# EAGLE board open-bldc (EAGLE 5.06)
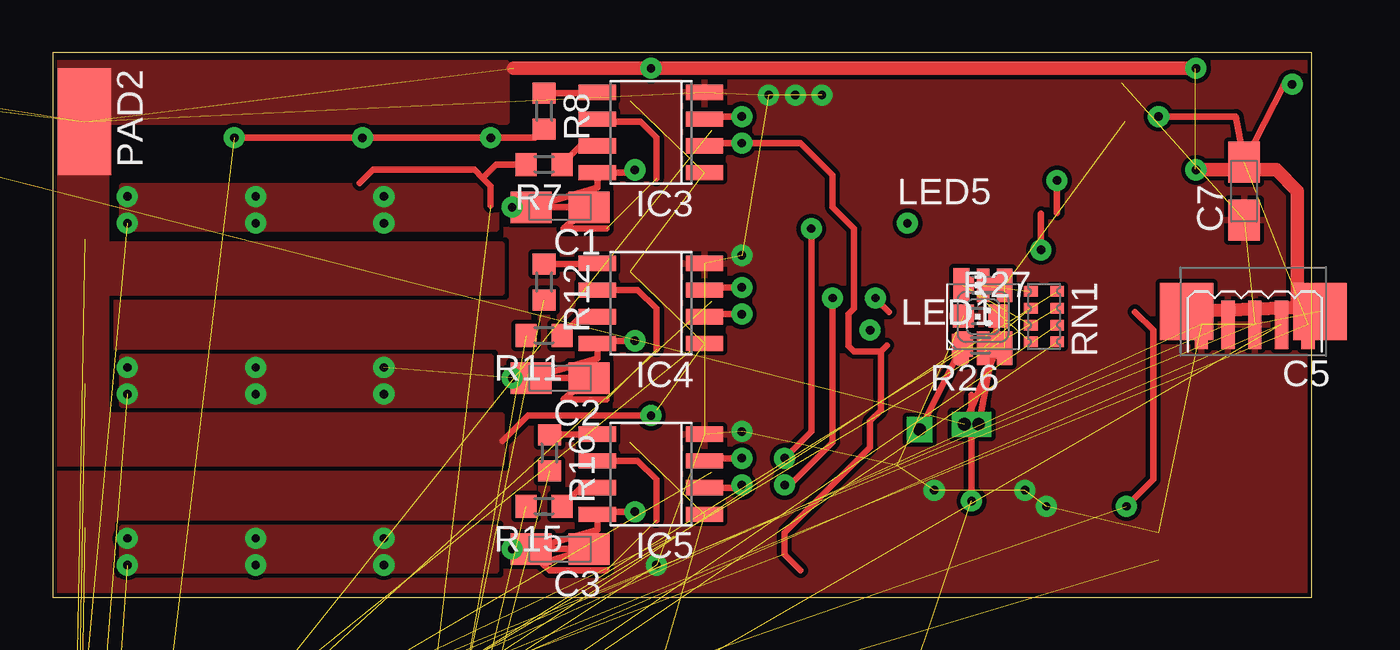
[diagram p0: board, top side]
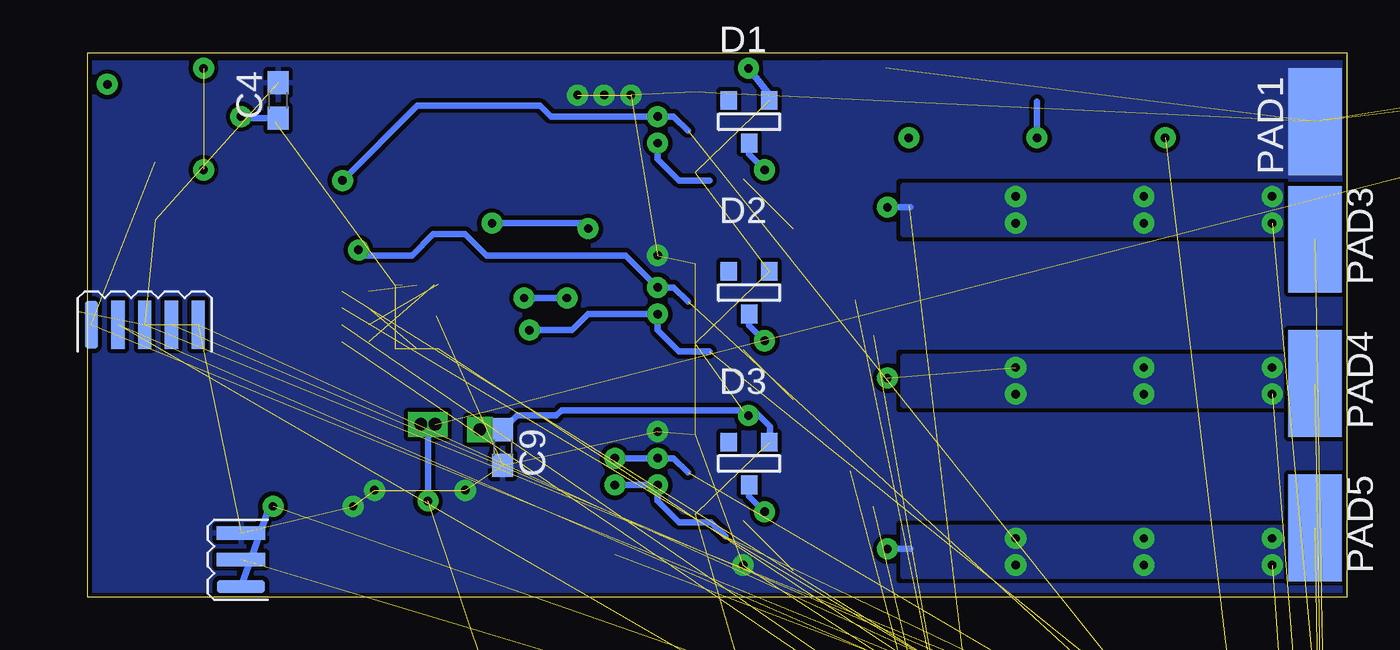
[diagram p1: board, bottom side, seen from below]

Size 59.87 x 25.9 mm. Coordinates in mm from the lower left corner, seen from the top.
Outline: 0,0 0,25.9 59.87,25.9 59.87,0 0.01,0
Copper layers (1*16): Top 0.035mm / dielectric 1.6mm / Bottom 0.035mm
Design rules "PCB-CART *": minimum track width 0.2mm, minimum drill 0.4mm, track to track 0.2mm, track to pad 0.2mm, pad to pad 0.2mm, via to via 0.2mm, smd to smd 0.2mm, copper to edge 0.2mm, drill to drill 0.2mm, minimum pad ring 0.4mm, minimum via ring 0.3mm, stop-mask expansion 3mil, vias tented up to drill 0mil, thermal gap 8mil
Net classes: 0 default: width 0.152 mm, drill 0.305 mm, clearance 0.152 mm

## Footprints (pad centres in the part's own frame; a part is rotated, then mirrored left to right if it is on the bottom)
SO8 = smd 0.72 x 1.78: 1 -1.905,-2.35; 2 -0.635,-2.35; 3 0.635,-2.35; 4 1.905,-2.35; 5 1.905,2.35; 6 0.635,2.35; 7 -0.635,2.35; 8 -1.905,2.35
A/3216-18R = smd 1.95 x 1.5: + 1.375,0; - -1.375,0
C0603 = smd 1.1 x 1: 1 -0.85,0; 2 0.85,0
D/7343-31R = smd 2.55 x 2.7: + 3.175,0; - -3.175,0
E5-6 = drill 0.813 pad 1.905 round: + -2.54,0 | drill 0.813 pad 1.905 octagon: - 2.54,0
SOT-23 = smd 0.787 x 0.889: 1 0.025,-1.016; 2 -0.94,1.016; 3 0.991,1.016
SOT23 = smd 1 x 1.4: 1 -0.95,-1.1; 2 0.95,-1.1; 3 0,1.1
PIN_HDR_EDG_1.27MM_3-1 = smd 2.3 x 0.635: P$1 0,0; P$2 0,1.27; P$3 0,2.54
TQFP48 = smd 0.2 x 1: 1 -2.75,-4.5; 2 -2.25,-4.5; 3 -1.75,-4.5; 4 -1.25,-4.5; 5 -0.75,-4.5; 6 -0.25,-4.5; 7 0.25,-4.5; 8 0.75,-4.5; 9 1.25,-4.5; 10 1.75,-4.5; 11 2.25,-4.5; 12 2.75,-4.5; 25 2.75,4.5; 26 2.25,4.5; 27 1.75,4.5; 28 1.25,4.5; 29 0.75,4.5; 30 0.25,4.5; 31 -0.25,4.5; 32 -0.75,4.5; 33 -1.25,4.5; 34 -1.75,4.5; 35 -2.25,4.5; 36 -2.75,4.5 | smd 1 x 0.2: 13 4.5,-2.75; 14 4.5,-2.25; 15 4.5,-1.75; 16 4.5,-1.25; 17 4.5,-0.75; 18 4.5,-0.25; 19 4.5,0.25; 20 4.5,0.75; 21 4.5,1.25; 22 4.5,1.75; 23 4.5,2.25; 24 4.5,2.75; 37 -4.5,2.75; 38 -4.5,2.25; 39 -4.5,1.75; 40 -4.5,1.25; 41 -4.5,0.75; 42 -4.5,0.25; 43 -4.5,-0.25; 44 -4.5,-0.75; 45 -4.5,-1.25; 46 -4.5,-1.75; 47 -4.5,-2.25; 48 -4.5,-2.75
SOT223 = smd 1.219 x 2.235: 1 -2.311,-3.099; 2 0,-3.099; 3 2.311,-3.099 | smd 3.6 x 2.2: 4 0,3.099
SO-8 = smd 0.72 x 1.78: 1 -1.905,-2.543; 2 -0.635,-2.543; 3 0.635,-2.543; 4 1.905,-2.543; 5 1.905,2.543; 6 0.635,2.543; 7 -0.635,2.543; 8 -1.905,2.543
PIN_HDR_1.27MM_10 = drill 0.5 square: P$1 0,0 | drill 0.5 round: P$2 0,1.27; P$3 0,2.54; P$4 0,3.81; P$5 0,5.08; P$6 0,6.35; P$7 0,7.62; P$8 0,8.89; P$9 0,10.16; P$10 0,11.43
PIN_HDR_EDG_1.27MM_5-2 = smd 2.3 x 0.635: P$1 0,0; P$3 0,1.27; P$5 0,2.54; P$7 0,3.81; P$9 0,5.08 | smd 2.3 x 0.635 bottom: P$2 0,0; P$4 0,1.27; P$6 0,2.54; P$8 0,3.81; P$10 0,5.08
CHIP-LED0603 = smd 0.8 x 0.8: A 0,-0.75; C 0,0.75
PLCC6 = smd 0.75 x 1.6: A1 -1.025,-1.5; A2 1.025,-1.5; A3 1.025,1.5; C1 -1.025,1.525 | smd 0.6 x 1.6: C2 0,-1.5; C3 0,1.5
SMD2,54-5,08 = smd 2.54 x 5.08: 1 0,0
D2PACK = smd 2.083 x 3.81: 1 -2.54,-8.89; 3 2.54,-8.89 | smd 11.43 x 8.89: 2 0,2.54
R0603 = smd 1 x 1.1: 1 -0.85,0; 2 0.85,0
0603-ARC = smd 0.5 x 0.65: 1 -1.2,-0.625; 2 -0.4,-0.625; 3 0.4,-0.625; 4 1.2,-0.625; 5 1.2,0.625; 6 0.4,0.625; 7 -0.4,0.625; 8 -1.2,0.625
EXB34V = smd 0.5 x 0.5: 1 -0.5,-0.7; 2 0.5,-0.7; 3 0.5,0.7; 4 -0.5,0.7
SJ = smd 1.168 x 1.6: 1 -0.762,0; 2 0.762,0
SJ2S = smd 1 x 1.1: 1 -1.3,0; 2 0,0; 3 1.3,0
ZX62-B-5PA = smd 1.8 x 1.9: GND_LEFT -4,0; GND_RIGHT 4,0 | smd 1.9 x 1.9: GND_MID_LEFT -1.2,0; GND_MID_RIGHT 1.2,0 | smd 2.1 x 1.6: GND_UP_LEFT -3.1,2.6; GND_UP_RIGHT 3.1,2.6 | smd 0.4 x 1.35: PIN_1 -1.3,2.725; PIN_2 -0.65,2.725; PIN_3 0,2.725; PIN_4 0.65,2.725; PIN_5 1.3,2.725
PIN_HDR_EDG_1.27MM_3-2 = smd 2.3 x 0.635: P$1 0,0; P$3 0,1.27; P$5 0,2.54 | smd 2.3 x 0.635 bottom: P$2 0,0; P$4 0,1.27; P$6 0,2.54

## Placement (x,y rotation side)
ACS1  ACS712  [SO8]  -6.88,-339.04 0 top  (outside the outline)
ACS2  ACS712  [SO8]  -6.88,-361.19 0 top  (outside the outline)
ACS3  ACS712  [SO8]  -6.88,-383.36 0 top  (outside the outline)
ACS712  ACS712  [SO8]  1.8,-96.19 0 top  (outside the outline)
C1  10µ  [A/3216-18R]  24.13,18.54 180 top
C2  10µ  [A/3216-18R]  24.13,10.41 180 top
C3  10µ  [A/3216-18R]  24.13,2.29 180 top
C4  100nF  [C0603]  50.8,23.62 90 bottom
C5  100µ  [D/7343-31R]  57.08,13.59 180 top
C6  100nF  [C0603]  6.86,-155.07 0 top  (outside the outline)
C7  1µ  [A/3216-18R]  56.64,19.3 90 top
C8  1µ  [A/3216-18R]  10.19,-147.7 0 top  (outside the outline)
C9  100n  [C0603]  40.13,7.11 270 bottom
C10  100n  [C0603]  -1.6,-102.74 0 top  (outside the outline)
C11  1n  [C0603]  -1.7,-108.48 0 top  (outside the outline)
C12  100n  [C0603]  -2.51,-132.59 0 top  (outside the outline)
C13  1n  [C0603]  -2.62,-160.12 0 top  (outside the outline)
C14  100nF  [C0603]  0,-22.86 0 top  (outside the outline)
C15  1n  [C0603]  -2.72,-165.86 0 top  (outside the outline)
C16  1n  [C0603]  -2.82,-171.58 0 top  (outside the outline)
C17  47p  [C0603]  -16.08,-228.68 0 top  (outside the outline)
C18  47p  [C0603]  -16.18,-234.42 0 top  (outside the outline)
C19  100n  [C0603]  -0.3,-345.59 0 top  (outside the outline)
C20  1n  [C0603]  -4.42,-352.15 0 top  (outside the outline)
C21  100n  [C0603]  -10.16,-352.17 0 top  (outside the outline)
C22  100n  [C0603]  -0.3,-367.74 0 top  (outside the outline)
C23  1n  [C0603]  -4.42,-374.32 0 top  (outside the outline)
C24  100n  [C0603]  -10.16,-374.35 0 top  (outside the outline)
C25  100n  [C0603]  -0.3,-389.92 0 top  (outside the outline)
C26  1n  [C0603]  -4.42,-396.49 0 top  (outside the outline)
C27  100n  [C0603]  -10.16,-396.49 0 top  (outside the outline)
C28  100n  [C0603]  -19.5,-402.5 0 top  (outside the outline)
C29  100n  [C0603]  -19.5,-408.5 0 top  (outside the outline)
C30  100n  [C0603]  -19.5,-414.5 0 top  (outside the outline)
C31  100µ  [D/7343-31R]  -101.76,-453.89 0 top  (outside the outline)
C32  100nF  [C0603]  -124.62,-526.9 0 top  (outside the outline)
C33  100nF  [C0603]  -124.72,-532.64 0 top  (outside the outline)
C34  100nF  [C0603]  -124.82,-538.37 0 top  (outside the outline)
C35  4µ7  [A/3216-18R]  -123.95,-544.36 0 top  (outside the outline)
C36  10nF  [C0603]  -125.69,-550.1 0 top  (outside the outline)
C37  1µ  [C0603]  -125.79,-555.83 0 top  (outside the outline)
C38  100µ  [D/7343-31R]  -132.12,-563.56 0 top  (outside the outline)
C39  100µ  [D/7343-31R]  -132.45,-572.47 0 top  (outside the outline)
C40  100n  [C0603]  -135.83,-579.84 0 top  (outside the outline)
C41  optional  [E5-6]  -133.81,-586.6 0 top  (outside the outline)
D1  BAS21  [SOT-23]  28.45,22.61 0 bottom
D2  BAS21  [SOT-23]  28.45,14.48 0 bottom
D3  BAS21  [SOT-23]  28.45,6.35 0 bottom
D4  BAS70-04  [SOT23]  0.41,-41.96 0 top  (outside the outline)
D5  BAS70-04  [SOT23]  0.08,-67.26 0 top  (outside the outline)
D6  BAS70-04  [SOT23]  -0.18,-86.69 0 top  (outside the outline)
I2C  PIN_HDR_EDG_1.27MM_3-1  [PIN_HDR_EDG_1.27MM_3-1]  52.58,0.51 0 bottom
IC1  STM32F10XCXT6  [TQFP48]  3.81,-13.97 0 top  (outside the outline)
IC2  3V3 vreg  [SOT223]  -101.35,-463.13 0 top  (outside the outline)
IC3  IR2101  [SO-8]  28.45,22.1 90 top
IC4  IR2101  [SO-8]  28.45,13.97 90 top
IC5  IR2101  [SO-8]  28.45,5.84 90 top
IC6  5V vreg  [SOT223]  -101.73,-472.38 0 top  (outside the outline)
JP11  PIN_HDR_1.27MM_10  [PIN_HDR_1.27MM_10]  -101.71,-447.71 0 top  (outside the outline)
JP12  PIN_HDR_1.27MM_10  [PIN_HDR_1.27MM_10]  -104.68,-448.28 0 top  (outside the outline)
JP21  PIN_HDR_1.27MM_10  [PIN_HDR_1.27MM_10]  -104.37,35.08 0 top  (outside the outline)
JP22  PIN_HDR_1.27MM_10  [PIN_HDR_1.27MM_10]  -101.09,35.08 0 top  (outside the outline)
JTAG  PIN_HDR_EDG_1.27MM_5-2  [PIN_HDR_EDG_1.27MM_5-2]  59.69,12.95 270 bottom
LED1  AMBER  [CHIP-LED0603]  44.16,14.85 90 top
LED5  LED_LRTB_G6TG  [PLCC6]  44.23,13.33 0 top
PAD1  BATT-  [SMD2,54-5,08]  1.52,22.61 0 bottom
PAD2  BATT+  [SMD2,54-5,08]  1.52,22.61 180 top
PAD3  PHASE_A  [SMD2,54-5,08]  1.52,17.02 180 bottom
PAD4  PHASE_B  [SMD2,54-5,08]  1.52,10.16 180 bottom
PAD5  PHASE_C  [SMD2,54-5,08]  1.52,3.3 180 bottom
PAD6  BATT+  [SMD2,54-5,08]  -128.77,-556.08 0 top  (outside the outline)
PAD7  BATT-  [SMD2,54-5,08]  -133.41,-556.31 0 top  (outside the outline)
Q1  IRF3704S  [D2PACK]  -31.88,-434.76 0 top  (outside the outline)
Q2  IRF3704S  [D2PACK]  -44.27,-435.27 0 top  (outside the outline)
Q3  IRF3704S  [D2PACK]  -56.66,-435.78 0 top  (outside the outline)
Q4  IRF3704S  [D2PACK]  -69.05,-436.3 0 top  (outside the outline)
Q5  IRF3704S  [D2PACK]  -81.44,-436.81 0 top  (outside the outline)
Q6  IRF3704S  [D2PACK]  -93.83,-437.32 0 top  (outside the outline)
R1  NP  [R0603]  -131.45,61.27 0 top  (outside the outline)
R2  0  [R0603]  -131.45,67.82 0 top  (outside the outline)
R7  22  [R0603]  23.37,20.57 180 top
R8  22  [R0603]  23.37,23.11 270 top
R11  22  [R0603]  23.37,12.45 180 top
R12  22  [R0603]  23.37,14.99 270 top
R15  22  [R0603]  23.37,4.32 180 top
R16  R22  [R0603]  23.62,6.86 270 top
R17  10k  [R0603]  -0.43,-35.08 0 top  (outside the outline)
R18  3k6  [R0603]  -0.56,-48.64 0 top  (outside the outline)
R19  10k  [R0603]  -0.66,-54.51 0 top  (outside the outline)
R20  3k6  [R0603]  -0.76,-60.38 0 top  (outside the outline)
R21  10k  [R0603]  -0.89,-73.94 0 top  (outside the outline)
R22  3k6  [R0603]  -0.99,-79.81 0 top  (outside the outline)
R23  2k  [R0603]  -1.8,-114.35 0 top  (outside the outline)
R24  10k  [R0603]  -1.91,-120.19 0 top  (outside the outline)
R26  10k  [R0603]  44.11,11.97 180 top
R27  2k7  [R0603]  44.15,13.36 0 top
R34  22  [R0603]  -15.88,-217.07 0 top  (outside the outline)
R35  22  [R0603]  -15.98,-222.94 0 top  (outside the outline)
R36  1k5  [R0603]  -16.31,-240.26 0 top  (outside the outline)
R41  2k  [R0603]  -10.16,-346.41 0 top  (outside the outline)
R42  10k  [R0603]  -5.23,-346.41 0 top  (outside the outline)
R43  2k  [R0603]  -10.16,-368.58 0 top  (outside the outline)
R44  10k  [R0603]  -5.23,-368.58 0 top  (outside the outline)
R45  2k  [R0603]  -10.16,-390.75 0 top  (outside the outline)
R46  10k  [R0603]  -5.23,-390.75 0 top  (outside the outline)
RN1  1k  [0603-ARC]  47.13,13.34 90 top
RN2  10k  [EXB34V]  -119.73,-487.71 0 top  (outside the outline)
RN3  10k  [EXB34V]  -119.85,-492.32 0 top  (outside the outline)
RN4  10k  [EXB34V]  -119.98,-496.93 0 top  (outside the outline)
RN5  10k  [EXB34V]  -120.11,-503.17 0 top  (outside the outline)
RN6  10k  [EXB34V]  -120.24,-509.42 0 top  (outside the outline)
RN7  10k  [EXB34V]  -120.37,-515.67 0 top  (outside the outline)
SJ1  [SJ]  -14.96,-212.85 0 top  (outside the outline)
SJ2  SJ2S  [SJ2S]  -119.04,-521.91 0 top  (outside the outline)
SJ3  SJ2S  [SJ2S]  -113.63,49.82 0 top  (outside the outline)
SJ4  SJ2S  [SJ2S]  -113.63,54.73 0 top  (outside the outline)
U3  ZX62-B-5PA  [ZX62-B-5PA]  -13.28,-285.93 0 top  (outside the outline)
USART  PIN_HDR_EDG_1.27MM_3-2  [PIN_HDR_EDG_1.27MM_3-2]  -123.68,-522.82 0 top  (outside the outline)

## Library data of the parts
ACS1-ACS3 ACS712 I2C IC3-IC5 JP11 JP12 JP21 JP22 JTAG LED5 SJ2-SJ4 U3 USART = open-bldc
C1-C41 R1 R2 R7 R8 R11 R12 R15-R24 R26 R27 R34-R36 R41-R46 = rcl
D1-D3 = zetex
D4-D6 = diode
IC1 = stm32
IC2 IC6 = linear-technology
LED1 = led
PAD1-PAD7 = wirepad
Q1-Q6 = my-transistor-power
RN1-RN7 = resistor-dil
SJ1 = jumper

## Nets
+3V3: C4.1 C7.+ C32.1 C33.1 C34.1 C35.+ C36.1 C37.1 D4.2 D5.2 D6.2 IC1.9 IC1.24 IC1.36 IC1.48 IC2.3 JP12.P$2 JP22.P$2 JTAG.P$2 LED1.A LED5.A1 LED5.A2 LED5.A3 R36.1 RN5.1 RN5.2 RN6.1 RN6.2 RN7.3 RN7.4 USART.P$6
+5V: ACS1.8 ACS2.8 ACS3.8 ACS712.8 C6.1 C8.+ C10.1 C19.1 C22.1 C25.1 IC2.1 JP12.P$3 JP22.P$3 SJ1.1 USART.P$2
+12V: ACS712.1 ACS712.2 C5.+ C9.1 C28.1 C29.1 C30.1 C31.+ C38.+ C39.+ C40.1 C41.+ D1.3 D2.3 D3.3 IC3.1 IC4.1 IC5.1 IC6.1 JP12.P$4 JP22.P$4 PAD2.1 PAD6.1 R1.2 R26.2
+12V_I_SENSE: ACS712.3 ACS712.4 Q1.2 Q3.2 Q5.2
BATT_V: JP12.P$9 JP22.P$9 R26.1 R27.2
BEMF_A: C15.1 D4.3 R17.2 R18.1 SJ2.1
BEMF_B: C13.1 D5.3 R19.2 R20.1 SJ3.1
BEMF_C: C16.1 D6.3 R21.2 R22.1 SJ4.1
CTRL_A+: IC1.29 IC3.2 JP11.P$2 JP21.P$2 RN2.3
CTRL_A-: IC1.26 IC3.3 JP11.P$4 JP21.P$4 RN2.4
CTRL_B+: IC1.30 IC4.2 JP11.P$5 JP21.P$5 RN3.3
CTRL_B-: IC1.27 IC4.3 JP11.P$7 JP21.P$7 RN3.4
CTRL_C+: IC1.31 IC5.2 JP11.P$8 JP21.P$8 RN4.3
CTRL_C-: IC1.28 IC5.3 JP11.P$10 JP21.P$10 RN4.4
GND: ACS1.5 ACS2.5 ACS3.5 ACS712.5 C4.2 C5.- C6.2 C7.- C8.- C9.2 C10.2 C11.2 C12.2 C13.2 C14.2 C15.2 C16.2 C17.2 C18.2 C19.2 C20.2 C21.2 C22.2 C23.2 C24.2 C25.2 C26.2 C27.2 C28.2 C29.2 C30.2 C31.- C32.2 C33.2 C34.2 C35.- C36.2 C37.2 C38.- C39.- C40.2 C41.- D4.1 D5.1 D6.1 I2C.P$3 IC1.8 IC1.23 IC1.35 IC1.47 IC2.2 IC2.4 IC3.4 IC4.4 IC5.4 IC6.2 IC6.4 JP11.P$1 JP12.P$1 JP21.P$1 JP22.P$1 JTAG.P$6 JTAG.P$8 JTAG.P$10 PAD1.1 PAD7.1 Q2.3 Q4.3 Q6.3 R2.1 R18.2 R20.2 R22.2 R24.2 R27.1 R42.2 R44.2 R46.2 RN2.1 RN2.2 RN3.1 RN3.2 RN4.1 RN4.2 U3.GND_LEFT U3.GND_RIGHT U3.GND_UP_LEFT U3.GND_UP_RIGHT U3.PIN_4 USART.P$3 USART.P$4
I/BEMF_A: IC1.10 JP11.P$3 JP21.P$3 SJ2.2
I/BEMF_B: IC1.11 JP11.P$6 JP21.P$6 SJ3.2
I/BEMF_C: IC1.12 JP11.P$9 JP21.P$9 SJ4.2
I_A: C21.1 R41.1 R42.1 SJ2.3
I_B: C24.1 R43.1 R44.1 SJ3.3
I_C: C27.1 R45.1 R46.1 SJ4.3
I_SENSE: C12.1 IC1.13 JP12.P$10 JP22.P$10 R23.1 R24.1
LED1: IC1.17 RN1.1
LED2: IC1.18 RN1.2
LED3: IC1.45 RN1.3
LED4: IC1.46 RN1.4
MOT_TEMP: IC1.19 JP12.P$8 JP22.P$8
N$1: IC4.7 R11.1
N$2: IC3.7 R7.1
N$3: LED1.C RN1.8
N$4: LED5.C1 RN1.7
N$5: LED5.C2 RN1.6
N$6: ACS712.7 R23.2
N$7: IC3.5 R8.1
N$10: LED5.C3 RN1.5
N$11: Q1.1 R7.2
N$12: C1.+ D1.1 IC3.8
N$13: IC4.5 R12.1
N$14: Q3.1 R11.2
N$15: Q5.1 R15.2
N$16: C2.+ D2.1 IC4.8
N$17: Q6.1 R16.2
N$18: IC5.7 R15.1
N$19: IC5.5 R16.1
N$21: C3.+ D3.1 IC5.8
N$23: ACS712.6 C11.1
N$25: R34.1 U3.PIN_2
N$26: SJ1.2 U3.PIN_5
N$28: R35.1 R36.2 U3.PIN_3
N$31: ACS1.6 C20.1
N$32: ACS1.7 R41.2
N$34: ACS2.6 C23.1
N$35: ACS2.7 R43.2
N$37: ACS3.6 C26.1
N$38: ACS3.7 R45.2
N$40: ACS1.3 ACS1.4 PAD3.1
N$41: ACS2.3 ACS2.4 PAD4.1
N$42: ACS3.3 ACS3.4 PAD5.1
N$43: Q2.1 R8.2
N$44: Q4.1 R12.2
NC: JP12.P$6 JP22.P$6
PHASE_A: ACS1.1 ACS1.2 C1.- IC3.6 Q1.3 Q2.2 R17.1
PHASE_B: ACS2.1 ACS2.2 C2.- IC4.6 Q3.3 Q4.2 R19.1
PHASE_C: ACS3.1 ACS3.2 C3.- IC5.6 Q5.3 Q6.2 R21.1
PS_ID: IC1.16 JP12.P$5 JP22.P$5 R1.1 R2.2
RST: C14.1 IC1.7 JTAG.P$3 RN6.4
RXD: IC1.22 USART.P$1
SCL: I2C.P$1 IC1.42
SDA: I2C.P$2 IC1.43
TCK: IC1.37 JTAG.P$7 RN7.1
TDI: IC1.38 JTAG.P$1 RN5.3
TDO: IC1.39 JTAG.P$9 RN7.2
TEMP: IC1.15 JP12.P$7 JP22.P$7
TMS: IC1.34 JTAG.P$5 RN6.3
TRST: IC1.40 JTAG.P$4 RN5.4
TXD: IC1.21 USART.P$5
USB_+5V: U3.PIN_1
USB_DM: C18.1 IC1.32 R34.2
USB_DP: C17.1 IC1.33 R35.2
V_BAT: IC1.14
VBAT: IC1.1

## Tracks (layer width: path | path; a pad name or v marks a point on that pad's centre or on a via)
+3V3  (via drill 0.4)  (29 unrouted)
  Top 0.305: v58.93,24.38 58.55,24.38 C7.+ 56.26,22.86 v52.58,22.86
  Bottom 0.305: v58.93,24.38 58.95,24.36 | 50.97,22.61 C4.1 52.49,22.77 v52.58,22.86
+5V  (14 unrouted)
+12V  (via drill 0.4, 0.6)  (23 unrouted)
  Top 0.305: 21.4,7.43 22.61,8.64 v28.45,8.64 | v41.23,7.96 R26.2
  Top 0.635: v54.36,20.32 58.17,20.32 59.18,19.3 59.18,13.78 C5.+ | 21.91,25.15 v28.45,25.15 v54.36,25.15
  Bottom 0.305: 27.43,7.39 27.43,8.13 28.19,8.89 v28.45,8.64 28.7,8.89 37.34,8.89 37.59,8.64 39.46,8.64 C9.1 v41.23,7.96 | D1.3 27.46,23.9 v28.45,25.15
  Bottom 0.635: v54.36,20.32 54.33,20.34 | v54.36,25.15 54.33,25.12
  pour Top (no thermals): 21.34,6.35 0,6.35 0,25.4 21.59,25.4 21.59,22.61 2.54,22.61 2.54,16.76 21.34,16.76 21.34,14.48 2.54,14.48 2.54,8.64 21.34,8.64
+12V_I_SENSE  (4 unrouted)
BATT_V  (via drill 0.4, 0.6)  (2 unrouted)
  Top 0.305: v43.69,4.57 43.69,9.61 | v44.03,8.22 R27.2 | v43.35,8.22 R26.1
  Bottom 0.305: 43.69,7.87 v44.03,8.22 | v43.69,4.57 43.69,7.87 | 43.69,7.87 v43.35,8.22
BEMF_A  (4 unrouted)
BEMF_B  (4 unrouted)
BEMF_C  (4 unrouted)
CTRL_A+  (via drill 0.4)  (4 unrouted)
  Top 0.305: IC3.2 arc-90 31.12,21.59 v32.77,21.59 35.56,21.59 37.08,20.07 37.08,18.54 38.1,17.53 38.1,13.72 37.85,13.46 37.85,11.94 38.1,11.68 39.37,11.68 | 39.37,11.68 39.66,11.97 | 39.37,11.68 39.37,8.89 38.86,8.38 38.86,7.11 34.8,3.05 34.8,2.03 35.56,1.27
  Bottom 0.305: 30.31,19.81 31.75,19.81 32.77,20.83 v32.77,21.59
CTRL_A-  (via drill 0.4)  (4 unrouted)
  Top 0.305: v32.77,22.86 31.12,22.86 IC3.3 | v47.75,19.81 47.75,18.27
  Bottom 0.305: 31.33,22.19 32,22.86 v32.77,22.86 37.85,22.86 38.35,23.37 44.2,23.37 v47.75,19.81
CTRL_B+  (via drill 0.4)  (4 unrouted)
  Top 0.305: v32.77,13.46 31.12,13.46 IC4.2 | v38.86,12.7 39.05,12.77
  Bottom 0.305: 30.31,11.68 31.75,11.68 32.77,12.7 v32.77,13.46 36.07,13.46 36.83,12.7 v38.86,12.7
CTRL_B-  (via drill 0.4)  (4 unrouted)
  Top 0.305: v32.77,14.73 31.12,14.73 IC4.3 | v46.99,16.51 46.99,18.23
  Bottom 0.305: 31.33,14.06 32,14.73 v32.77,14.73 34.29,16.26 40.89,16.26 41.91,17.27 43.43,17.27 44.45,16.26 46.74,16.26 v46.99,16.51
CTRL_C+  (via drill 0.4)  (4 unrouted)
  Top 0.305: v32.77,5.33 32.64,5.21 IC5.2 | v34.8,5.33 35.05,5.33 37.08,7.37 v37.08,14.22 | v39.12,14.22 39.77,13.57
  Bottom 0.305: 29.55,2.88 30.23,3.56 31.75,3.56 32.77,4.57 v32.77,5.33 v34.8,5.33 | v37.08,14.22 v39.12,14.22
CTRL_C-  (via drill 0.4)  (4 unrouted)
  Top 0.305: v32.77,6.6 31.12,6.6 IC5.3 | v34.8,6.6 36.07,7.87 v36.07,17.53 | v40.64,17.78 40.66,18.01
  Bottom 0.305: 31.33,5.93 32,6.6 v32.77,6.6 v34.8,6.6 | v36.07,17.53 36.32,17.78 v40.64,17.78
GND  (via drill 0.4)  (99 unrouted)
  other vias: 28.7,1.52 32.77,7.87 32.77,16.26 41.91,5.08 34.04,23.88 35.31,23.88 36.58,23.88 46.23,5.08 47.24,4.32
  pour Bottom (rank 3): 0,0 0,25.4 59.69,25.4 59.69,0
  pour Top (rank 3): 0,25.4 59.69,25.4 59.69,0 0,0
  pour Bottom (rank 2, no thermals): 0,25.4 24.89,25.4 25.65,-0.25 0,0
I/BEMF_A  (3 unrouted)
I/BEMF_B  (3 unrouted)
I/BEMF_C  (3 unrouted)
I_A  (3 unrouted)
I_B  (3 unrouted)
I_C  (3 unrouted)
I_SENSE  (5 unrouted)
LED1  (1 unrouted)
LED2  (1 unrouted)
LED3  (1 unrouted)
LED4  (1 unrouted)
MOT_TEMP  (2 unrouted)
N$1
  Top 0.305: R11.1 25.11,13.34 IC4.7
N$2
  Top 0.305: R7.1 25.11,21.46 IC3.7
N$3  (1 unrouted)
N$4  (1 unrouted)
N$5  (1 unrouted)
N$6  (1 unrouted)
N$7
  Top 0.305: R8.1 25.87,23.96 IC3.5
N$10  (1 unrouted)
N$11  (1 unrouted)
  Top 0.305: 14.61,19.68 15.24,20.32 20.07,20.32 20.45,19.94 | 20.45,19.94 20.83,19.56 20.83,18.61 | R7.2 21.08,20.57 20.45,19.94
N$12  (via drill 0.4)
  Top 0.305: C1.+ 25.91,19.47 IC3.8 27.56,20.19 v27.69,20.32
  Bottom 0.305: v27.69,20.32 28.42,21.06 D1.1
N$13
  Top 0.305: R12.1 25.87,15.84 IC4.5
N$14  (1 unrouted)
N$15  (1 unrouted)
N$16  (via drill 0.4)
  Top 0.305: C2.+ 25.91,11.34 IC4.8 26.03,12.19 v27.69,12.19
  Bottom 0.305: D2.1 28.42,12.93 v27.69,12.19
N$17  (1 unrouted)
N$18
  Top 0.305: 25.78,5.33 IC5.7 25.11,5.21 R15.1
N$19
  Top 0.305: 25.87,7.71 IC5.5 23.66,7.75 R16.1
N$21  (via drill 0.4)
  Top 0.305: v27.69,4.06 26.03,4.06 IC5.8 25.91,3.21 C3.+
  Bottom 0.305: D3.1 28.42,5.31 | D3.1 28.42,5.05 | v27.69,4.06 28.42,4.8 D3.1
N$23  (1 unrouted)
N$25  (1 unrouted)
N$26  (1 unrouted)
N$28  (2 unrouted)
N$31  (1 unrouted)
N$32  (1 unrouted)
N$34  (1 unrouted)
N$35  (1 unrouted)
N$37  (1 unrouted)
N$38  (1 unrouted)
N$40  (2 unrouted)
N$41  (2 unrouted)
N$42  (2 unrouted)
N$43  (via drill 0.4)  (1 unrouted)
  Top 0.305: v8.64,21.84 v14.73,21.84 v20.83,21.84 22.95,21.84 R8.2
  Bottom 0.305: v8.64,21.84 8.51,21.97 | v14.73,21.84 14.73,23.55 | v20.83,21.84 20.7,21.97
N$44  (1 unrouted)
NC  (1 unrouted)
PHASE_A  (via drill 0.4)  (6 unrouted)
  Top 0.305: v21.84,18.54 C1.- 24.3,17.53 26.33,17.53 | 28.7,19.9 28.7,21.84 27.94,22.61 26.03,22.61 IC3.6
  Bottom 0.305: v21.84,18.54 20.76,18.54
  other vias: 9.65,19.05 9.65,17.78 15.75,17.78 15.75,19.05 3.56,19.05 3.56,17.78
  pour Bottom (no thermals): 0.51,19.56 21.08,19.56 21.08,17.27 0.51,17.27
  pour Top (no thermals): 3.3,19.56 21.08,19.56 21.08,17.53 3.3,17.53
PHASE_B  (via drill 0.4)  (7 unrouted)
  Top 0.305: v21.84,10.41 C2.- 24.3,9.4 26.33,9.4 | 28.7,11.77 28.7,13.72 27.81,14.61 IC4.6
  Bottom 0.305: v21.84,10.41 21.84,10.35
  other vias: 9.65,10.92 9.65,9.65 15.75,10.92 15.75,9.65 3.56,10.92 3.56,9.65
  pour Bottom (no thermals): 0.51,11.43 21.08,11.43 21.08,9.14 0.51,9.14
  pour Top (no thermals): 3.3,11.43 20.83,11.43 20.83,9.14 3.3,9.14
PHASE_C  (via drill 0.4)  (6 unrouted)
  Top 0.305: v21.84,2.29 C3.- 23.28,1.61 23.62,1.27 26.33,1.27 | IC5.6 26.67,6.48 | 26.67,6.48 26.8,6.48 | 26.67,6.48 27.81,6.48 28.7,5.59 28.7,3.64
  Bottom 0.305: v21.84,2.29 20.76,2.29
  other vias: 9.65,2.79 9.65,1.52 15.75,2.79 15.75,1.52 3.56,2.79 3.56,1.52
  pour Bottom (no thermals): 0.51,3.3 21.08,3.3 21.08,1.02 0.51,1.02
  pour Top (no thermals): 3.3,3.3 21.08,3.3 21.08,1.27 3.3,1.27
PS_ID  (4 unrouted)
RST  (3 unrouted)
RXD  (1 unrouted)
SCL  (via drill 0.4)  (1 unrouted)
  Top 0.305: 51.45,13.57 52.32,12.7 52.32,5.59 v51.05,4.32
  Bottom 0.305: v51.05,4.32 51.31,4.06 I2C.P$1
SDA  (1 unrouted)
TCK  (2 unrouted)
TDI  (2 unrouted)
TDO  (2 unrouted)
TEMP  (2 unrouted)
TMS  (2 unrouted)
TRST  (2 unrouted)
TXD  (1 unrouted)
USB_DM  (2 unrouted)
USB_DP  (2 unrouted)

## Text on the board
tStop: Open-BLDC | V0.1
bStop: Open-BLDC | V0.1
Reference: open-bldc (C) 2008-2009 Piotr Esden-Tempski <piotr at esden dot net> | License: CC-BY-SA 3.0 DE | http://creativecommons.org/licenses/by-sa/3.0/de